# Altium PCB PCB_GUNV_2.PcbDoc
Units mm, origin at the board's own origin, x right, y up, seen from the top; angles counter-clockwise.
Board outline 14.5 x 13.7 mm, 2 copper layers (Top Layer, Bottom Layer), stack 1.036 mm thick; 21 components, 12 nets, 41 pads, 23 vias.
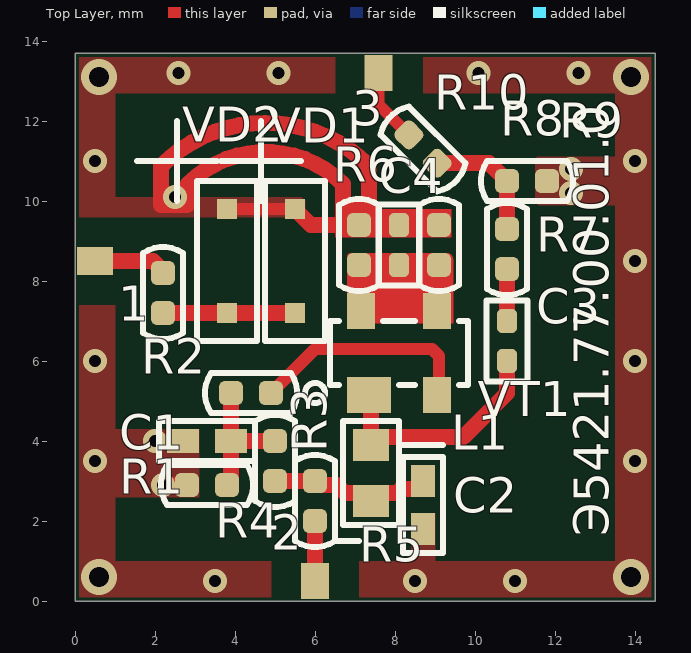
[diagram p0: Top Layer view]
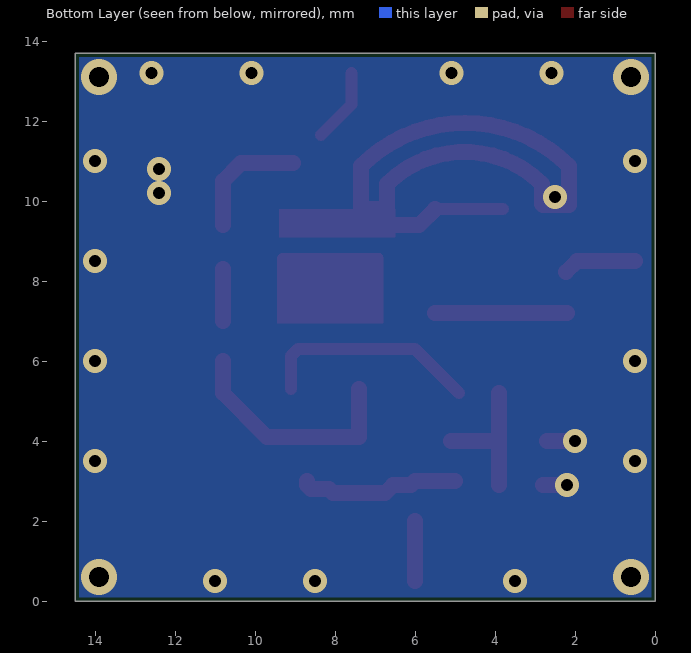
[diagram p1: Bottom Layer view, seen from below]

## Layer stack, top to bottom
Top Solder: solder mask 0.025, Solder Resist, Dk 3.5
Top Layer: signal copper 0.018
Dielectric 1: core 1, FR4, Dk 4.6
Bottom Layer: signal copper 0.018
Bottom Solder: solder mask 0.025, Solder Resist, Dk 3.5

## Board outline
0,0 0,13.7 14.5,13.7 14.5,0

## Design rules (kind name [scope] priority, off if disabled: settings)
Clearance [All] p1: gap=0.3 ignorepadtopadclearanceinfootprint=FALSE
ComponentClearance [All] p1: gap=0.2 collisioncheckmode=3 verticalgap=5 showdistances=FALSE
HoleSize [All] p1: absolutevalues=TRUE maxlimit=5 minlimit=0.025 maxpercent=80.000 minpercent=20.000
HoleToHoleClearance [All] p1: gap=0.3 allowstackedmicrovias=TRUE
MinimumSolderMaskSliver [All] p1: minsoldermaskwidth=0.12
PlaneConnect [All] p1: planeconnectstyle=Direct reliefexpansion=0.508 reliefentries=4 reliefconductorwidth=0.254 reliefairgap=0.254
PolygonConnect [All] p1: connectstyle=Direct reliefconductorwidth=0.254 reliefentries=4 polygonreliefangle="90 Angle" airgapwidth=0.254
RoutingVias [All] p1: holewidth=0.711 width=1.27 viastyle="Through Hole" minholewidth=0.711 minwidth=1.27 maxholewidth=0.711 maxwidth=1.27
ShortCircuit [All] p1: allowed=TRUE
SilkToSilkClearance [All] p1: silktosilkclearance=0
SilkToSolderMaskClearance [IsPad] p1: minsilkscreentomaskgap=0 clearancetoexposedcopper=TRUE
SolderMaskExpansion [All] p1: expansion=0.12
Width [All] p1: maxlimit=0.5 minlimit=0.254 preferedwidth=0.3 minimp=50.000000 maximp=50.000000 favimp=50.000000
22 further rules are at their usual default settings.

## Components (designator, comment, footprint, x,y, rotation, side; value= is the part's Value field where it differs from the comment)
1 "TP" TP1#1 0.5,8.5 r90 top locked
2 "TP" TP1#2 6,0.5 r90 top locked
3 "TP" TP1#3 7.6,13.2 r90 top locked
C1 "100" CAPC1005N 3.3,4 r180 top
C2 "1000" CAPC1005N 8.7,2.4 r270 top
C3 "100" CAPC1005L 10.8,6.5 r270 top
C4 "5,6" CAPC1005L 8.1,8.9 r270 top
L1 "43" INDC1608L 7.4,3.2 r90 top
R1 "2,7 к" RESC1005L 3.3,2.9 r180 top
R2 "2,7 к" RESC1005L 2.2,7.7 r90 top
R3 "510" RESC1005L 4.4,5.2 r0 top
R4 "2,7 к" RESC1005L 5,3.5 r90 top
R5 "68" RESC1005L 6,2.5 r90 top
R6 "510" RESC1005L 7.1,8.9 r90 top
R7 "11" RESC1005L 10.8,8.8 r270 top
R8 "510" RESC1005L 9.1,8.9 r90 top
R9 "100" RESC1005L 11.3,10.5 r0 top
R10 "11" RESC1005L 8.7,11.3 r315 top
VD1 "BB149" SOD2512X100N 5.5,8.5 r90 top
VD2 "BB149" SOD2512X100N 3.8,8.5 r90 top
VT1 "Comment" SOT143B 8.1,6.2 r0 top

## Footprints (in the part's own frame and the unit in brackets; to place one, negate y for a bottom-side part, rotate by r counter-clockwise, add the part's x,y. Pads: shape width x height; smd on the part's side, far side on the other; paste and mask are expansions set on the pad)
CAPC1005L [mm] "Chip Capacitor, Body 1.0x0.5mm, IPC High Density"
  rrect50% 0.6x0.5 smd: 1(-0.5,0) 2(0.5,0)
  Top Layer pour cut-out: -0.2,0.5 -0.2,-0.5 0.2,-0.5 0.2,0.5
  silkscreen extent -1.02,-0.51 1.02,0.51, body extent -0.55,-0.3 0.55,0.3, height 0.6
CAPC1005N [mm] "Chip Capacitor, Body 1.0x0.5mm, IPC Medium Density"
  rect 0.8x0.6 smd: 1(-0.6,0) 2(0.6,0)
  Top Layer pour cut-out: -0.2,0.5 -0.2,-0.5 0.2,-0.5 0.2,0.5
  silkscreen extent -1.2,-0.5 1.2,0.5, body extent -0.55,-0.3 0.55,0.3, height 0.6
INDC1608L [mm] "Chip Inductor, Body 1.6x0.8mm, IPC High Density"
  rect 0.8x0.9 smd: 1(-0.7,0) 2(0.7,0)
  Top Layer pour cut-out: -0.3,0.7 -0.3,-0.7 0.3,-0.7 0.3,0.7
  silkscreen extent -1.3,-0.7 1.3,0.7, body extent -0.87,-0.48 0.87,0.48, height 0.71
RESC1005L [mm] "Chip Resistor, Body 1.1x0.5mm, IPC High Density"
  rrect50% 0.6x0.6 smd: 1(-0.5,0) 2(0.5,0)
  Top Layer pour cut-out: -0.2,0.5 -0.2,-0.5 0.2,-0.5 0.2,0.5
  silkscreen extent -1.15,-0.5 1.15,0.5, body extent -0.55,-0.3 0.55,0.3, height 0.4
SOD2512X100N [mm] "SOD Diode; 1.8mm W X 1.35mm L X 1.00mm H Body"
  rect 0.5x0.5 smd: 1(-1.3,0) 2(1.3,0)
  silkscreen extent -2,-0.75 2,0.75, body extent -1.25,-0.62 1.25,0.63, height 0.96
SOT143B [mm] "SOT343, 4-Leads, Body 3,00x1,40mm, Pitch e 1,90mm, Pitch e1 1.70mm IPC Medium Density"
  rect 1.1x0.9 smd: 1(-0.75,-1.05)
  rect 0.7x0.9 smd: 2(0.95,-1.05) 3(0.95,1.05) 4(-0.95,1.05)
  silkscreen extent -2.35,-1.25 1.73,0.8, body extent -1.45,-1.18 1.45,1.18, height 1.22
TP1#1 [mm] "Test point 1x1.6"
  rect 0.7x0.9 smd mask+0.05: 1(0,0)
TP1#2 [mm] "Test point 1x1.6"
  rect 0.9x0.7 smd mask+0.05: 1(0,0)
TP1#3 [mm] "Test point 1x1.6"
  rect 0.9x0.7 smd mask+0.05: 1(0,0.01)

## Part data
1 2 3: "Test point"
C1 C2 C3 C4: library part C0402, "Чип-конденсатор"
L1: library part L0603, "Индуктивность без магнитопровода"
R1 R2 R3 R4 R5 R6 R7 R8 R9 R10: library part R0402, "Чип-резистор"
VD1 VD2: "UHF variable capacitance diode"

## Via types
v1: diameter 0.6, hole 0.3, Top Layer to Bottom Layer, tented both sides, 18 vias
v2: diameter 0.9, hole 0.5, Top Layer to Bottom Layer, 4 vias
v3: diameter 0.6, hole 0.3, Top Layer to Bottom Layer, 1 vias

## Nets (pads, with @x,y where several pads share a name; then routed paths per layer and width w, separated by ;. In a path a pad name is that pad's centre, name@x,y a point inside that pad or via, vN(x,y) a via of type N, cw(c..) or ccw(c..) an arc to the next point about the centre after c; other vN are vias at no path point)
GND: C1.2 C2.2 C4.1 R1.2 R6.2 R8.2 R9.2 VD1.2 VD2.2 | length 21.3
  Top Layer w0.3: VD2.2 VD1.2
  Top Layer w0.4: v1(2,4) C1.2 ; v1(2.2,2.9) R1.2 ; 2.8,9.9 2.15,9.9 2.15,10.875 cw(c4.75,8.275) 7.35,10.875 7.35,9.8 6.7,9.8 6.7,10.425 ccw(c4.763,8.488) 2.825,10.425 2.825,9.925 ; VD1.2 5.9,9.4 R6.2 R8.2
  other v1: 3.5,0.5 8.5,0.5 11,0.5 0.5,3.5 14,3.5 0.5,6 14,6 14,8.5 12.4,10.2 12.4,10.8 0.5,11 14,11 2.59,13.2 5.09,13.2 10.09,13.2 12.59,13.2
  other v2: 0.6,0.6 13.9,0.6 0.6,13.1 13.9,13.1
  other v3: 2.5,10.1
Net1_1: 1.1 R2.2 | length 1.8
  Top Layer w0.4: 1.1 1.95,8.5 R2.2@2.225,8.225
Net2_1: 2.1 R5.1 | length 1.5
  Top Layer w0.4: 2.1 R5.1
Net3_1: 3.1 R10.1 | length 1.9
  Top Layer w0.3: 3.1 7.59,12.41 R10.1
NetC1_1: C1.1 R1.1 R3.1 R4.2 | length 3.4
  Top Layer w0.4: R1.1@3.9,2.9 R3.1 ; C1.1@4,4 R4.2@5.1,4
NetC2_1: C2.1 L1.1 R4.1 R5.2 | length 4
  Top Layer w0.4: R4.1 R5.2 6.1,2.9 6.55,2.9 6.75,2.7 7.4,2.7 8.05,2.7 8.15,2.8 8.6,2.8 8.7,2.9 C2.1
NetC3_1: C3.1 R7.2 | length 1.3
  Top Layer w0.4: C3.1 R7.2
NetC3_2: C3.2 L1.2 VT1.1 | length 5.9
  Top Layer w0.4: VT1.1@7.4,5.3 7.4,4.1 9.7,4.1 10.8,5.2 C3.2
NetC4_2: C4.2 R6.1 R8.1 VT1.3 VT1.4
NetR2_1: R2.1 VD1.1 VD2.1 | length 3.3
  Top Layer w0.4: R2.1 VD1.1
NetR3_2: R3.2 VT1.2 | length 5.6
  Top Layer w0.3: R3.2 6,6.3 8.924,6.3 9.1,6.124 VT1.2@9.1,5.3
NetR7_1: R7.1 R9.1 R10.2 | length 3
  Top Layer w0.4: R10.2 10.354,10.946 R9.1 R7.1@10.8,9.4

## Polygon pours and split planes (outlines as drawn)
GND on Top Layer "GND Layer" (solid, pour order 8): 0.1,7.4 1,7.4 1,4.3 3.1,4.3 3.1,2.6 1,2.6 1,1 4.9,1 4.9,0.1 0.1,0.1
GND on Top Layer "GND Layer" (solid, pour order 10): 8.7,13.6 8.7,12.7 13.5,12.7 13.5,11.107 11.5,11.107 11.5,9.9 13.5,9.9 13.5,1 9,1 9,2.2 8.4,2.2 8.405,1 7.1,1 7.1,0.1 14.4,0.1 14.4,13.6
GND on Top Layer "GND Layer" (solid, pour order 6): 0.1,13.6 6.5,13.6 6.5,12.7 1,12.7 1,10.1 5.752,10.1 5.748,9.6 1,9.6 0.1,9.6
GND on Bottom Layer "GND Layer" (solid, pour order 12): 0.1,13.6 0.1,0.1 14.4,0.1 14.4,13.6

## Other copper
Top Layer:
  region net GND: 9.4,9.1 9.4,9.8 6.5,9.8 6.5,9.1
  region net NetC4_2: 6.8,8.6 6.8,6.95 9.45,6.95 9.45,8.55 ccw(c9.3,8.55) 9.3,8.7 6.9,8.7 ccw(c6.9,8.6)

## Silkscreen, mask and mechanical layers (free items; w line width, h text height)
Top Overlay:
  lines w0.15: 3.65,11 5.65,11 ; 4.65,10 4.65,12 ; 6.5,1.5 7.1,1.5 ; 8.1,3.9 9.2,3.9 ; 8.2,3.6 9.2,3.6
  text "Э5421.77.00.01.0" at 13.625,1.625 h1.5 r90
Top Solder:
  region: 1,9.6 1,7.4 0.001,7.4 0,7.399 0,9.6
  region: 6.5,13.7 8.7,13.7 8.7,12.701 8.701,12.7 6.5,12.7
  region: 4.9,1 7.1,1 7.1,0.001 7.101,0 4.9,0
Mechanical 2:
  the board outline again, w0.4